# Altium PCB PNEV5180B_V2.0.PcbDoc (part 2 of 2)
Units mm, origin at the board's own origin, x right, y up, seen from the top; angles counter-clockwise.
Board outline 154.43 x 67.26 mm, 4 copper layers (Top Layer, Top, Internal Plane 1, MidLayer1, Bottom Layer, Bottom), stack 1.42 mm thick; 217 components, 117 nets, 604 pads, 342 vias.
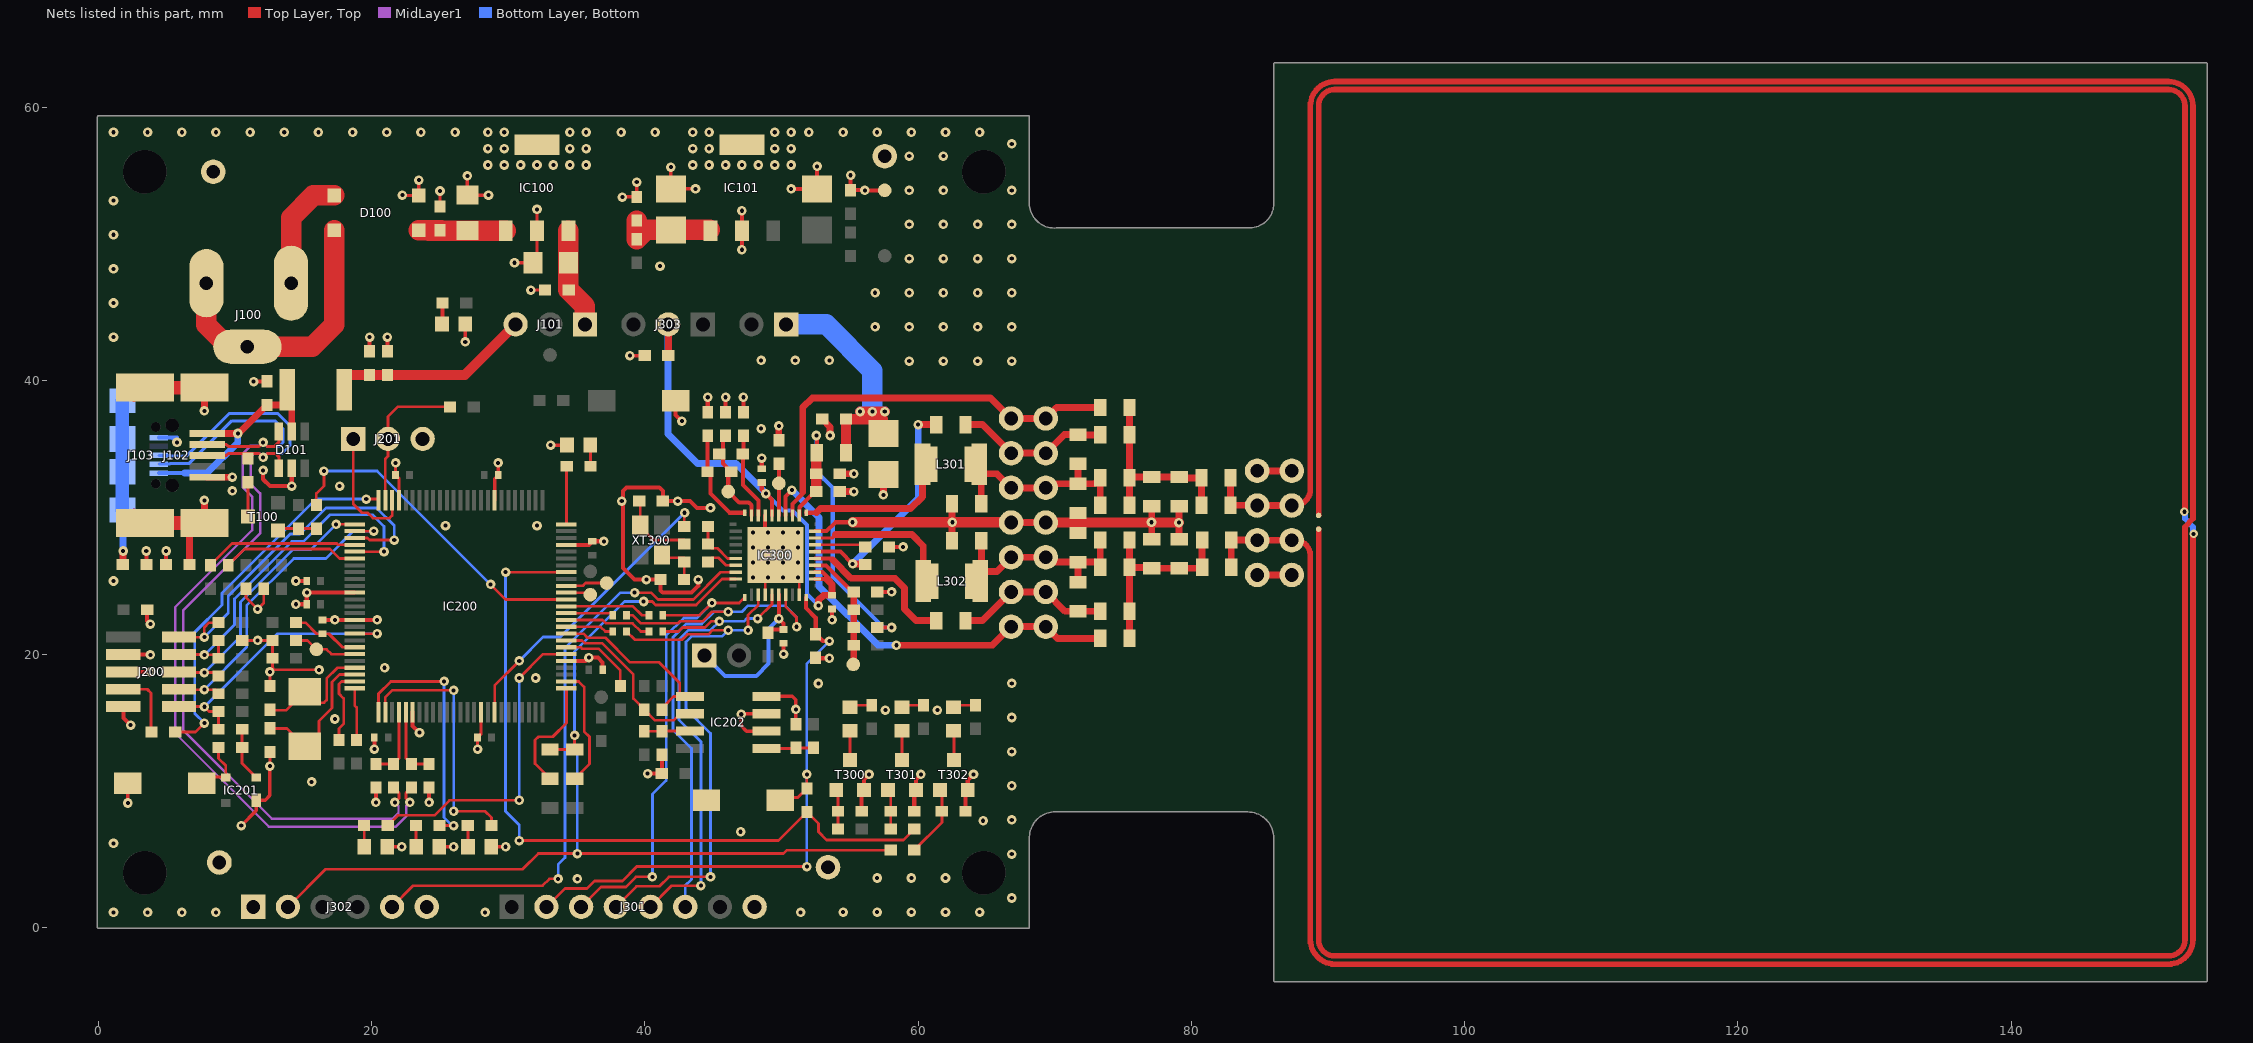
[diagram p4: the nets of this part, all layers, seen from the top]

## Via types
v1: diameter 0.7, hole 0.3, Top Layer, Top to Bottom Layer, Bottom, 324 vias
v2: diameter 0.5, hole 0.3, Top Layer, Top to Bottom Layer, Bottom, 16 vias
v3: diameter 0.6, hole 0.3, Top Layer, Top to Bottom Layer, Bottom, 2 vias

## Nets (pads, with @x,y where several pads share a name; then routed paths per layer and width w, separated by ;. In a path a pad name is that pad's centre, name@x,y a point inside that pad or via, vN(x,y) a via of type N, cw(c..) or ccw(c..) an arc to the next point about the centre after c; other vN are vias at no path point) (continued)
GND: C100.2 C101.2 C102.2 C103.2 C104.2 C105.2 C106.2 C107.2 C108.2 C109.2 C110.2 C200.2 C201.2 C202.2 C203.1 C204.1 C205.1 C206.1 C207.1 C208.1 C209.1 C210.1 C211.1 C212.1 C213.1 C214.1 C300.2 C301.1 C302.2 C303.1 C304.1 C309.2 C310.1 C311.1 C312.1 C313.1 C314.2 C315.2 C316.2 C317.2 C319.2 C323.1 C324.1 C325.1 C326.2 C327.2 C328.2 C329.1 C330.1 C331.2 C332.1 D100.4 D101.2 IC100.2 IC100.4 IC101.2 IC101.4 IC200.11 IC200.15 IC200.31 IC200.41 IC200.55 IC200.72 IC200.83 IC200.97 IC201.1 IC202.2 IC202.3 IC202.4 IC300.4 IC300.9 IC300.19 IC300.27 IC300.EP J102.5 J103.5 J200.3 J200.5 J200.9 J201.3 J301.8 J302.1 J302.6 K102.1 K103.1 K104.1 K105.1 K106.1 K310.1 K311.1 L101.1 L102.1 LD100.1 LD200.1 LD201.1 LD202.1 LD203.1 R209.1 R210.1 R212.1 R220.1 R229.2 R231.2 R237.1 R302.2 R305.2 R308.2 SW200.2 SW201.1 SW300.1 T300.2 T301.2 T302.2 | length 205.2
  Top Layer, Top w0.2: R237.1@10.514,21 v1(11.65,21) R220.1@12.736,21 R212.1@12.736,19.7 12.736,19.014 12.9,18.85 v1(16.15,18.85) ; R210.1@10.8,24.786 10.8,24.15 v1(11.65,23.3) 12.1,23.75 R209.1@12.1,24.786 ; v1(12.55,11.8) C202.2@12.55,12.836 ; C201.2@12.55,17.664 v1(12.55,18.7) ; IC300.4@48.8,24.35 48.8,26.5 v2(49,26.7) IC300.EP@49.55,27.25 ; v2(51.2,25.6) 51.3,25.5 IC300.9@51.3,24.35
  Top Layer, Top w0.25: v1(2.15,9.1) SW201.1@2.15,10.55 ; v1(10.45,7.45) 11.552,8.552 IC201.1@11.552,9.3 12.2,9.3 12.55,9.65 v1(12.55,11.8) ; LD200.1@21.15,5.9 v1(22.2,5.9) ; v1(21.75,34) 21.742,33.992 C211.1@21.742,33.1 22,32.842 IC200.97@22,31.25 ; v1(22.25,53.6) 22.28,53.57 D100.4@23.449,53.57 v1(23.45,54.7) v1(23.45,54.7) ; LD202.1@24.95,5.9 v1(26,5.9) ; C100.2@25,52.764 v1(25,53.9) ; v1(26.85,42.85) LD100.1@26.85,44.15 ; v1(27,55) C101.2@27,53.6 v1(28.55,53.6) ; v1(27.75,13.05) 27.742,13.058 C206.1@27.742,13.9 28,14.158 IC200.41@28,15.75 ; LD203.1@28.75,5.9 v1(29.8,5.9) ; IC200.83@29,31.25 29,32.842 C207.1@29.258,33.1 29.258,33.992 v1(29.25,34) ; v1(30.45,48.65) C102.2@31.8,48.65 32.1,48.95 IC100.2@32.1,51 v1(32.1,52.55) ; v1(31.65,46.65) C103.2@32.686,46.65 ; v1(33.1,35.3) LD201.1@34.3,35.3 ; v1(38.35,53.45) 38.364,53.464 C104.2@39.4,53.464 v1(39.4,54.55) ; v1(38.9,41.85) C331.2@39.986,41.85 ; v1(41.9,55.65) C105.2@41.9,54.05 v1(43.7,54.05) ; IC202.2@48.894,14.365 47.435,14.365 47.05,14.75 v1(47.05,15.6) 47.085,15.635 IC202.3@48.894,15.635 ; IC202.4@48.894,16.905 50.795,16.905 51.05,16.65 v1(51.05,15.95) R229.2@51.05,14.864
  Top Layer, Top w0.3: J200.9@1.818,16.16 1.818,15.332 v1(2.35,14.8) ; J200.5@1.818,18.7 v1(3.8,18.7) ; J200.3@1.818,19.97 3.78,19.97 v1(3.8,19.95) ; v1(3.5,27.55) 3.514,27.536 L102.1@3.514,26.55 ; C200.2@3.564,23.25 3.564,22.436 v1(3.8,22.2) ; L101.1@4.936,26.55 4.936,27.536 v1(4.95,27.55) ; v1(11.35,39.95) 11.364,39.964 C108.2@12.35,39.964 ; v1(12.05,33.45) 12.05,32.8 12.55,32.3 v1(14.15,32.3) D101.2@14.15,33.6 ; v1(14.45,23.65) C213.1@15.242,23.65 15.242,24.492 v1(15.25,24.5) ; v1(14.45,25.35) C212.1@15.242,25.35 ; v1@15.4,24.5 IC200.11@18.75,24.5 ; C205.1@16.4,22.508 16.408,22.5 v1(17.3,22.5) IC200.15@18.75,22.5 v1(20.4,22.5) ; C109.2@19.85,42.164 v1(19.85,43.2) ; C208.1@20.192,13.9 20.192,13.058 v1(20.2,13.05) ; v1(20.3,9.15) C203.1@20.3,10.236 ; C110.2@21.15,42.164 v1(21.15,43.2) ; IC200.31@23,15.75 23,14.75 v1(23.5,14.25) ; v1(24.2,9.15) C204.1@24.2,10.236 ; IC200.55@34.25,19.5 35.65,19.5 v1(35.9,19.75) 36.55,19.75 36.908,19.392 C209.1@36.908,18.85 ; IC200.72@34.25,28 35.892,28 C210.1@36.15,28.258 36.992,28.258 v1(37,28.25) ; v1(40.2,11.25) C214.1@41.236,11.25 41.236,12.623 R231.2@41.25,12.636 ; SW200.2@42.25,38.55 42.25,37.5 v1(42.7,37.05) ; v1(43.9,25.45) 43.9,24.986 43.414,24.5 41.3,24.5 41.136,24.664 C324.1@41.136,25.45 v1(40.1,25.45) 39.25,25.45 38.4,26.3 38.4,31.95 38.65,32.2 41.05,32.2 41.314,31.936 C323.1@41.314,31.2 v1(42.4,31.2) 43.3,31.2 43.8,30.7 v1(44.8,30.7) ; C328.2@44.6,37.714 v1(44.6,38.8) ; C327.2@45.9,37.714 v1(45.9,38.8) ; v1(47.1,49.6) IC101.2@47.1,51 v1(47.1,52.45) ; C326.2@47.2,37.714 v1(47.2,38.8) ; C329.1@48.55,33.566 v1(48.55,34.35) ; IC300.27@48.8,30.15 48.8,28 IC300.EP@49.55,27.25 v2(51.2,25.6) ; v1(50.15,20) C325.1@50.15,20.792 ; v1(50.7,54.05) C106.2@52.6,54.05 v1(52.6,55.7) ; IC300.19@52.45,29 53.3,29 53.95,29.65 v1(55.2,29.65) ; C309.2@52.5,19.736 52.536,19.7 v1(53.5,19.7) ; v1(53.7,22.5) C330.1@53.7,23.292 ; v1(55.05,55.05) C107.2@55.05,53.964 56.086,53.964 v1(56.1,53.95) K102.1@57.55,53.95 ; R302.2@55.864,8.55 T300.2@55.864,9.782 ; T300.2@56.032,10.05 56.032,10.832 v1(56.4,11.2) ; C332.1@57.014,24.55 v1(58.05,24.55) ; C304.1@57.864,27.85 v1(58.9,27.85) ; R305.2@59.714,8.55 T301.2@59.714,9.832 ; T301.2@59.832,10.05 59.832,10.832 v1(60.2,11.2) ; R308.2@63.464,8.55 T302.2@63.464,9.782 ; T302.2@63.632,10.05 63.632,10.782 v1(64.05,11.2)
  Top Layer, Top w0.5: J102.5@7.95,32.95 v1(9.8,32.95) ; C319.2@49.8,35.664 v1(49.8,36.7) ; C301.1@52.986,37.2 53.55,36.636 v1(53.55,36) ; C303.1@54.264,31.9 v1(55.3,31.9) ; C302.2@54.264,33.2 v1(55.3,33.2) ; v1(57.45,31.65) C300.2@57.45,33.15 ; C314.2@62.483,28.3 62.483,29.65 v1@62.483,29.667 ; C310.1@62.483,31 v1@62.483,29.667 ; v1(62.5,29.65) v1@62.483,29.667 ; K310.1@66.802,29.63 K311.1@69.342,29.63 ; C316.2@77.1,28.417 77.1,29.63 C312.1@77.1,30.833 ; C317.2@79.1,28.417 79.1,29.611 v1(79.08,29.63) 79.1,29.65 C313.1@79.1,30.833
  Top Layer, Top w0.75: v1(55.2,29.65) 62.483,29.65 v1(62.5,29.65) K310.1@66.783,29.65 ; K311.1@69.342,29.63 77.1,29.63 v1(79.08,29.63)
  Bottom Layer, Bottom w0.3: J103.5@4.425,35.85 5.4,35.85 ; 5.4,35.85 v1(5.75,35.5) 5.75,35.85 5.4,35.85
  other v1: 1.1,1.1 3.6,1.1 6.1,1.1 8.6,1.1 28.3,1.1 51.4,1.1 54.5,1.112 57,1.112 59.5,1.112 62,1.112 64.5,1.112 66.85,2.15 35.05,3.55 57,3.612 59.5,3.612 62,3.612 66.85,5.362 1.1,6.15 47,7 64.75,7.8 66.85,7.862 66.85,10.362 15.6,10.65 66.85,12.862 17.3,15.25 66.85,15.362 57.6,15.9 61.4,15.9 52.7,17.85 66.85,17.862 32,18.25 20.95,19 1.1,25.35 25.4,29.4 32.1,29.4 77.08,29.65 38.3,31.2 9.8,31.95 17.65,32.3 48.5,36.5 59.35,41.45 61.85,41.45 64.35,41.45 66.85,41.45 48.5,41.5 51,41.5 53.5,41.5 1.1,43.2 56.85,43.95 59.35,43.95 61.85,43.95 64.35,43.95 66.85,43.95 1.1,45.7 56.85,46.45 59.35,46.45 61.85,46.45 64.35,46.45 66.85,46.45 1.1,48.2 41.1,48.4 59.35,48.95 61.85,48.95 64.35,48.95 66.85,48.95 1.1,50.7 59.35,51.45 61.85,51.45 64.35,51.45 66.85,51.45 1.1,53.2 59.35,53.95 61.85,53.95 66.85,53.95 28.5,55.8 29.7,55.8 30.9,55.8 32.1,55.8 33.3,55.8 34.5,55.8 35.7,55.8 43.5,55.8 44.7,55.8 45.9,55.8 47.1,55.8 48.3,55.8 49.5,55.8 50.7,55.8 59.35,56.45 61.85,56.45 28.5,57 29.7,57 34.5,57 35.7,57 43.5,57 44.7,57 49.5,57 50.7,57 66.85,57.35 1.1,58.2 3.6,58.2 6.1,58.2 8.6,58.2 11.1,58.2 13.6,58.2 16.1,58.2 18.6,58.2 21.1,58.2 23.6,58.2 26.1,58.2 28.5,58.2 29.7,58.2 34.5,58.2 35.7,58.2 38.25,58.2 40.75,58.2 43.5,58.2 44.7,58.2 49.5,58.2 50.7,58.2 52,58.2 54.5,58.2 57,58.2 59.5,58.2 62,58.2 64.5,58.2
  other v2: 47.9,25.6 49,25.6 50.1,25.6 47.9,26.7 50.1,26.7 51.2,26.7 47.9,27.8 49,27.8 50.1,27.8 51.2,27.8 47.9,28.9 49,28.9 50.1,28.9 51.2,28.9
GPI1: IC200.65 K204.1 | length 1.8
  Top Layer, Top w0.2: IC200.65@34.25,24.5 35.8,24.5 K204.1@36,24.3
GPO1: IC300.38 J302.5 | length 45.3
  Top Layer, Top w0.2: J302.5@21.488,1.5 23.038,3.05 32.5,3.05 33,3.55 v1(33.65,3.55) ; v1(39.25,24.5) 40.45,24.5 40.95,24 43.55,24 45.55,26 IC300.38@46.65,26
  Bottom Layer, Bottom w0.2: v1(33.65,3.55) 33.65,4.6 34.15,5.1 34.15,20.45 38.2,24.5 v1(39.25,24.5)
IRQ: IC300.39 J302.2 R232.1 R235.1 R307.2 | length 77.8
  Top Layer, Top w0.2: J302.2@13.868,1.5 16.618,4.25 31.05,4.25 32.2,5.4 v1(35.05,5.4) 50.15,5.4 50.4,5.65 R307.2@57.986,5.65 ; R235.1@33.05,13.017 R232.1@34.85,13.017 v1(34.85,14.05) ; v1(39.9,23.85) 40.534,23.85 40.784,23.6 43.75,23.6 45.65,25.5 IC300.39@46.65,25.5
  Bottom Layer, Bottom w0.2: v1(35.05,5.4) 35.05,11.9 35.05,12.75 34.85,12.95 v1(34.85,14.05) 34.85,20.2 38.5,23.85 v1(39.9,23.85)
LED_B: IC200.26 R223.1 | length 18.5
  Top Layer, Top w0.2: IC200.26@20.5,15.75 20.5,17.1 21.4,18 v1(25.3,18) ; R223.1@24.964,7.45 v1(26,7.45)
  Bottom Layer, Bottom w0.2: v1(25.3,18) 25.3,8.05 v1@26,7.35
LED_G: IC200.27 R226.1 | length 18.7
  Top Layer, Top w0.2: IC200.27@21,15.75 21,16.85 21.5,17.35 v1(26,17.35) ; v1(26,8.5) 28.3,8.5 28.764,8.036 R226.1@28.764,7.45
  Bottom Layer, Bottom w0.2: v1(26,8.5) v1(26,17.35)
LED_O: IC200.75 R222.1 | length 4.3
  Top Layer, Top w0.2: IC200.75@34.25,29.5 34.25,33.714 R222.1@34.286,33.75
LED_R: IC200.56 R221.1 | length 23.5
  Top Layer, Top w0.2: R221.1@21.164,7.45 21.914,8.2 24.6,8.2 25.7,9.3 v1(30.8,9.3) ; v1(30.8,18.25) 32.55,20 IC200.56@34.25,20
  Bottom Layer, Bottom w0.2: v1(30.8,9.3) v1(30.8,18.25)
LPC_BUSY: IC200.52 R232.2 R233.2 | length 8.8
  Top Layer, Top w0.2: IC200.52@34.25,18 35.15,18 35.55,17.6 35.55,14.35 35.95,13.95 35.95,11.967 R233.2@34.85,10.867
LPC_IRQ: IC200.51 R234.2 R235.2 | length 8.6
  Top Layer, Top w0.2: R235.2@33.05,10.883 31.95,11.983 31.95,13.7 32.2,13.95 33.25,13.95 34.25,14.95 IC200.51@34.25,17.5
LPC_OSC: IC200.43 R318.1 | length 22.1
  Top Layer, Top w0.2: IC200.43@29,15.75 29,17.7 v1(30.8,19.5) ; R318.1@42.886,29.35 v1@42.886,30.336
  Top Layer, Top w0.3: v1@42.886,30.336 v1(42.9,30.35)
  Bottom Layer, Bottom w0.2: v1(30.8,19.5) 32.55,21.25 33.8,21.25 v1(42.9,30.35)
MISO: IC300.5 J301.5 R241.1 | length 36
  Top Layer, Top w0.2: J301.5@40.411,1.5 41.961,3.05 v1(44.1,3.05) ; R241.1@41.308,21.65 42.45,21.65 42.75,21.95 44.4,21.95 44.85,22.4 v1(45.45,22.4) ; v1(48.25,22.6) 49.3,23.65 IC300.5@49.3,24.35
  Bottom Layer, Bottom w0.2: v1(44.1,3.05) 44.1,13.584 42.5,15.184 42.5,21.05 43.2,21.75 44.8,21.75 v1(45.45,22.4) 47.25,22.4 47.45,22.6 v1(48.25,22.6)
MOSI: IC300.3 J301.4 R242.1 | length 41.6
  Top Layer, Top w0.2: J301.4@37.871,1.5 39.371,3 41.05,3 41.75,3.7 v1(44.8,3.7) ; R242.1@38.658,21.65 39.258,21.05 42.7,21.05 43.1,21.45 44.65,21.45 44.95,21.75 v1(46.1,21.75) ; v1(47.55,21.75) 47.55,22.85 48.3,23.6 IC300.3@48.3,24.35
  Bottom Layer, Bottom w0.2: v1(44.8,3.7) 44.8,14.2 43,16 43,20.9 43.4,21.3 45.65,21.3 v1(46.1,21.75) v1(47.55,21.75)
NetC100_1: C100.1 C101.1 D100.3 IC100.1 | length 7.3
  Top Layer, Top w1.5: D100.3@23.449,51.03 C100.1@25.094,51.03 ; 24.186,51 C101.1@27,51 IC100.1@29.8,51
NetC102_1: C102.1 C103.1 IC100.3 J101.1 | length 7.4
  Top Layer, Top w1.5: IC100.3@34.4,51 C102.1@34.4,48.65 34.4,46.664 C103.1@34.414,46.65 35.611,45.453 J101.1@35.611,44.134
NetC104_1: C104.1 C105.1 IC101.1 R100.1 | length 7
  Top Layer, Top w1.5: C104.1@39.4,51.736 R100.1@39.4,50.364 40.086,51.05 C105.1@41.9,51.05 IC101.1@44.75,51.05
NetC109_1: C109.1 C110.1 J101.3 L100.2 | length 14.1
  Top Layer, Top w0.5: J101.3@30.529,44.136 J101.3@30.531,44.134
  Top Layer, Top w0.75: L100.2@17.983,39.35 L100.2@17.996,39.336 ; L100.2@17.996,40.436 C109.1@19.85,40.436 C110.1@21.15,40.436 26.829,40.436 J101.3@30.529,44.136
NetC201_1: C201.1 IC200.22 XT200.2 | length 9.1
  Top Layer, Top w0.2: C201.1@12.55,15.9 13.75,15.9 XT200.2@15.1,17.25 15.9,16.45 16.5,16.45 16.7,16.65 16.7,18.2 17.5,19 IC200.22@18.75,19
NetC202_1: C202.1 IC200.23 XT200.1 | length 9.5
  Top Layer, Top w0.2: C202.1@12.55,14.564 13.786,14.564 XT200.1@15.1,13.25 XT200.1@15.3,13.25 ; XT200.1@16.15,14.05 16.15,15.1 17.1,16.05 17.1,17.95 17.65,18.5 IC200.23@18.75,18.5
NetC203_2: C203.2 IC200.29 R215.2 | length 5.2
  Top Layer, Top w0.22: C203.2@20.3,11.964 R215.2@21.6,11.964 21.99,12.354 IC200.29@21.99,15.75
NetC204_2: C204.2 IC200.30 R217.2 | length 5.2
  Top Layer, Top w0.22: IC200.30@22.51,15.75 22.51,12.354 R217.2@22.9,11.964 C204.2@24.2,11.964
NetC205_2: C205.2 IC200.19 R218.1 | length 5
  Top Layer, Top w0.2: R218.1@14.464,22.3 15.15,22.3 15.958,21.492 C205.2@16.4,21.492 16.858,21.492 17.85,20.5 IC200.19@18.75,20.5
NetC300_1: C300.1 C301.2 J300.1 L300.2 | length 19.5
  Top Layer, Top w0.75: L300.2@54.717,34.75 54.717,37.197 C301.2@54.714,37.2 57.4,37.2 ; v1(55.75,37.75) v1(56.65,37.75) v1(57.55,37.75)
  Bottom Layer, Bottom w0.75: v1(55.75,37.75) v1(56.65,37.75) v1(57.55,37.75)
  Bottom Layer, Bottom w1.5: J300.1@50.334,44.134 53.266,44.134 56.65,40.75 v1(56.65,37.75)
NetC302_1: C302.1 C303.2 IC300.22 L300.1 R322.1 | length 24.1
  Top Layer, Top w0.3: IC300.22@51.3,30.15 51.3,30.75 C303.2@52.275,31.725 ; v1(52.55,36) 52.583,35.967 L300.1@52.583,34.75 ; R322.1@57.014,21.95 v1(58.05,21.95)
  Top Layer, Top w0.75: C303.2@52.536,31.9 C302.1@52.536,33.2 L300.1@52.536,34.75 ; L300.1@52.583,34.483 L300.1@52.583,34.75
  Bottom Layer, Bottom w0.3: v1(52.55,36) 52.55,33.35 53.75,32.15 53.75,25.65 57.45,21.95 v1(58.05,21.95)
NetC304_2: C304.2 IC300.17 | length 3.7
  Top Layer, Top w0.2: IC300.17@52.45,28 55.986,28 C304.2@56.136,27.85
NetC305_1: C305.1 IC300.23 K300.1 K301.1 | length 31.2
  Top Layer, Top w0.3: IC300.23@50.8,30.15 50.8,31 51.55,31.75 51.55,31.85
  Top Layer, Top w0.5: 51.55,31.85 51.55,38.05 52.25,38.75 65.302,38.75 K300.1@66.802,37.25 K301.1@69.342,37.25 70.142,38.05 C305.1@73.333,38.05
NetC305_2: C305.2 C307.2 C308.2 C312.2 C313.2 R309.1 R311.2 R313.2 | length 14.5
  Top Layer, Top w0.5: C308.2@75.467,30.9 C307.2@75.467,32.9 ; C305.2@75.467,38.05 R309.1@75.467,36.05 C307.2@75.467,32.9 ; R313.2@80.733,30.9 R311.2@80.733,32.9 79.167,32.9 C313.2@79.1,32.967 C312.2@77.1,32.967 75.534,32.967 C307.2@75.467,32.9
NetC306_1: C306.1 IC300.16 R321.1 | length 17.6
  Top Layer, Top w0.3: IC300.16@52.45,27.5 54.3,27.5 v1(55.2,26.6)
  Top Layer, Top w0.5: v1(55.2,26.6) 56.086,26.6 R321.1@56.136,26.55 ; v1(60,36.8) C306.1@61.333,36.8
  Bottom Layer, Bottom w0.5: v1(55.2,26.6) 60,31.4 v1(60,36.8)
NetC306_2: C306.2 K302.1 K303.1 R309.2 R310.1 | length 11.3
  Top Layer, Top w0.5: C306.2@63.467,36.8 64.712,36.8 K302.1@66.802,34.71 K303.1@69.342,34.71 70.698,36.067 R310.1@71.7,36.067 71.717,36.05 R309.2@73.333,36.05
NetC307_1: C307.1 C308.1 C310.2 C311.2 K304.1 K305.1 L301.2 R310.2 | length 16.1
  Top Layer, Top w0.5: L301.2@63.924,33.9 L301.2@64.617,33.207 ; C310.2@64.617,31 L301.2@64.617,33.207 ; K305.1@69.342,32.17 K304.1@66.802,32.17 65.773,33.2 64.624,33.2 L301.2@64.617,33.207 ; K305.1@69.342,32.17 69.638,32.467 C311.2@71.7,32.467 ; R310.2@71.7,33.933 C311.2@71.7,32.467 ; C308.1@73.333,30.9 C307.1@73.333,32.9 72.9,32.467 C311.2@71.7,32.467
NetC314_1: C314.1 C315.1 C318.1 C320.1 K316.1 K317.1 L302.2 R316.1 | length 16.6
  Top Layer, Top w0.5: L302.2@63.974,25.35 64.5,25.35 L302.2@64.633,25.483 ; C314.1@64.617,28.3 64.633,28.284 L302.2@64.633,26.05 ; L302.2@64.633,25.35 L302.2@64.633,25.483 ; R316.1@71.7,25.267 C315.1@71.7,26.733 ; C318.1@73.333,28.35 C320.1@73.333,26.35 72.95,26.733 C315.1@71.7,26.733 ; L302.2@64.633,25.483 L302.2@64.633,26.05 ; L302.2@64.633,26.05 65.762,26.05 K316.1@66.802,27.09 K317.1@69.342,27.09 69.7,26.733 C315.1@71.7,26.733
NetC316_1: C316.1 C317.1 C318.2 C320.2 C322.2 R314.2 R315.2 R317.1 | length 14.6
  Top Layer, Top w0.5: C322.2@75.467,21.15 R317.1@75.467,23.15 C320.2@75.467,26.35 ; C318.2@75.467,28.35 C320.2@75.467,26.35 ; R314.2@80.783,28.35 R315.2@80.783,26.35 80.716,26.283 C317.1@79.1,26.283 C316.1@77.1,26.283 77.033,26.35 C320.2@75.467,26.35
NetC319_1: C319.1 IC300.25 K323.1 | length 3.8
  Top Layer, Top w0.3: IC300.25@49.8,30.15 K323.1@49.8,32.5 C319.1@49.8,33.936
NetC321_1: C321.1 IC300.15 | length 11.6
  Top Layer, Top w0.3: IC300.15@52.45,27 53.75,27
  Top Layer, Top w0.5: 53.75,26.9 55.1,25.55 58.3,25.55 59,24.85 59,23.3 59.85,22.45 C321.1@61.333,22.45
NetC321_2: C321.2 K318.1 K319.1 R316.2 R317.2 | length 11.3
  Top Layer, Top w0.5: C321.2@63.467,22.45 64.702,22.45 K318.1@66.802,24.55 K319.1@69.342,24.55 70.76,23.133 R316.2@71.7,23.133 73.316,23.133 R317.2@73.333,23.15
NetC322_1: C322.1 IC300.24 K320.1 K321.1 | length 33.2
  Top Layer, Top w0.3: IC300.24@50.3,30.15 50.3,31.55 v1(50.75,32)
  Top Layer, Top w0.5: v1(58.4,20.65) 65.442,20.65 K320.1@66.803,22.01 K321.1@69.343,22.01 70.203,21.15 C322.1@73.333,21.15
  Bottom Layer, Bottom w0.5: v1(50.75,32) 52.75,30 52.75,24.95 57.05,20.65 v1(58.4,20.65)
NetC323_2: C323.2 R319.1 XT300.3 | length 5.5
  Top Layer, Top w0.2: C323.2@39.586,31.2 39.65,31.136 XT300.3@39.65,29.45 39.65,29.326 40.626,28.35 R319.1@42.886,28.35
NetC324_2: C324.2 R320.1 XT300.1 | length 2.8
  Top Layer, Top w0.2: XT300.1@41.236,27.236 XT300.1@41.25,27.25 ; XT300.1@41.45,27.05 R320.1@42.886,27.05 ; C324.2@42.864,25.45 42.886,25.473 R320.1@42.886,26.75
NetC326_1: C326.1 IC300.28 R326.1 | length 6.3
  Top Layer, Top w0.3: C326.1@47.2,35.986 47.2,34.686 R326.1@47.164,34.65 47.164,32.386 48.3,31.25 IC300.28@48.3,30.15
NetC327_1: C327.1 IC300.29 K322.1 R326.2 R327.2 | length 7.5
  Top Layer, Top w0.3: C327.1@45.9,35.986 45.7,35.786 45.7,34.914 R326.2@45.436,34.65 45.7,34.386 45.7,33.964 R327.2@46.314,33.35 ; R327.2@46.1,33.336 K322.1@46.1,31.9 46.9,31.1 47.6,31.1 47.8,30.9 IC300.29@47.8,30.15
NetC328_1: C328.1 IC300.30 R327.1 | length 7.3
  Top Layer, Top w0.3: R327.1@44.586,33.35 44.586,35.973 C328.1@44.6,35.986 ; R327.1@44.8,33.336 44.8,31.75 46.2,30.35 IC300.30@47.3,30.35
NetC329_2: C329.2 C330.2 C331.1 IC300.12 IC300.13 IC300.26 J303.2 | length 37.3
  Top Layer, Top w0.3: C329.2@48.55,32.55 48.55,32.05 v1(48.85,31.75) 49.3,31.3 IC300.26@49.3,30.15 ; IC300.12@52.45,25.5 53.3,25.5 ; IC300.13@52.45,26 53,26 53.6,25.4
  Top Layer, Top w0.5: J303.2@41.698,44.134 41.714,44.119 C331.1@41.714,41.85 ; v1(52.7,23.55) 52.7,23.95 53.058,24.308 C330.2@53.7,24.308 53.7,25.1 53.3,25.5
  Bottom Layer, Bottom w0.3: v1(48.85,31.75) 50.1,30.5 50.8,30.5 51.85,29.45 51.85,24.4 v1(52.7,23.55)
  Bottom Layer, Bottom w0.5: J303.2@41.698,44.134 41.698,36.102 43.85,33.95 46.65,33.95 v1(48.85,31.75)
NetC332_2: C332.2 IC300.14 K324.1 R322.2 R323.2 R324.2 | length 8.6
  Top Layer, Top w0.3: IC300.14@52.45,26.5 53.25,26.5 C332.2@55.018,24.732
  Top Layer, Top w0.5: K324.1@55.25,19.25 55.286,19.286 R323.2@55.286,20.65 ; C332.2@55.286,24.55 R324.2@55.286,23.25 R322.2@55.286,21.95 R323.2@55.286,20.65 ; R323.2@55.3,20.636 R323.2@55.286,20.65
NetD100_1: D100.1 J100.1 | length 8.6
  Top Layer, Top w1.5: J100.1@14.1,47.15 14.1,51.95 15.72,53.57 D100.1@17.251,53.57
NetD100_2: D100.2 J100.2 J100.3 | length 20.7
  Top Layer, Top w1.5: J100.2@7.9,47.15 7.9,44.1 9.5,42.5 J100.3@10.9,42.5 15.65,42.5 17.251,44.101 D100.2@17.251,51.03
NetIC200_4: IC200.4 R204.1 | length 11.2
  Top Layer, Top w0.2: R204.1@8.2,26.514 9.786,28.1 17.45,28.1 17.55,28 IC200.4@18.75,28
NetIC200_6: IC200.6 R211.2 | length 10
  Top Layer, Top w0.2: R211.2@9.5,26.514 10.686,27.7 16.95,27.7 17.65,27 IC200.6@18.75,27
NetIC200_20: IC200.20 K200.1 R220.2 | length 4.9
  Top Layer, Top w0.2: R220.2@14.464,21 15.3,21 K200.1@15.95,20.35 ; K200.1@15.75,20.35 K200.1@15.95,20.35 ; IC200.20@18.75,20 17.05,20 16.7,20.35 K200.1@15.95,20.35
NetIC200_24: IC200.24 R214.2 | length 5.6
  Top Layer, Top w0.2: R214.2@17.6,13.714 17.6,14.55 17.95,14.9 17.95,16.75 17.6,17.1 17.6,17.8 17.8,18 IC200.24@18.75,18
NetIC200_25: IC200.25 R213.2 | length 3.8
  Top Layer, Top w0.2: IC200.25@18.75,17.5 18.75,16.25 18.9,16.1 R213.2@18.9,13.714
NetIC200_57: IC200.57 R207.2 | length 5.8
  Top Layer, Top w0.2: IC200.57@34.25,20.5 35.3,20.5 35.4,20.4 36.6,20.4 38.2,18.8 R207.2@38.2,17.664
NetIC200_60: IC200.60 R242.2 | length 3.5
  Top Layer, Top w0.2: IC200.60@34.25,22 36.75,22 37.1,21.65 R242.2@37.642,21.65
NetIC200_61: IC200.61 R241.2 | length 6.4
  Top Layer, Top w0.2: IC200.61@34.25,22.5 36.9,22.5 37.15,22.25 39.1,22.25 39.7,21.65 R241.2@40.292,21.65
NetIC200_62: IC200.62 R239.2 | length 3.5
  Top Layer, Top w0.2: IC200.62@34.25,23 37.492,23 R239.2@37.642,22.85
NetIC200_63: IC200.63 R240.2 | length 6.3
  Top Layer, Top w0.2: IC200.63@34.25,23.5 39.116,23.5 39.766,22.85 R240.2@40.292,22.85
NetIC200_100: IC200.100 R238.1 | length 27.4
  Top Layer, Top w0.2: R238.1@5.614,14.3 7.1,14.3 v1(7.75,14.95) ; v1(19.6,31.35) 20.4,31.35 IC200.100@20.5,31.25
  Bottom Layer, Bottom w0.2: v1(7.75,14.95) 7.05,15.65 7.05,21.6 9.05,23.6 9.05,24.478 15.922,31.35 v1(19.6,31.35)
NetIC201_2: IC201.2 R206.1 R216.2 | length 4
  Top Layer, Top w0.2: R206.1@10.514,14.5 R216.2@10.514,13.15 10.514,12.014 IC201.2@11.552,10.976
NetIC201_3: IC201.3 R216.1 SW201.2 | length 4.2
  Top Layer, Top w0.2: SW201.2@7.55,11 9.293,11 IC201.3@9.316,10.976 9.316,11.834 8.786,12.364 R216.1@8.786,13.15
NetIC202_1: IC202.1 R225.2 R229.1 | length 3.5
  Top Layer, Top w0.2: IC202.1@48.894,13.095 51.009,13.095 R229.1@51.05,13.136 R225.2@52.35,13.136
NetIC202_7: IC202.7 R230.2 R231.1 | length 3.4
  Top Layer, Top w0.2: R230.2@39.95,14.364 R231.1@41.25,14.364 ; R231.1@41.179,14.365 IC202.7@43.306,14.365
NetIC300_18: IC300.18 L302.1 | length 10.9
  Top Layer, Top w0.25: IC300.18@52.45,28.5 53.7,28.5 53.95,28.75
  Top Layer, Top w0.5: 53.95,28.75 59.55,28.75 60.367,27.933 L302.1@60.367,25.35
NetIC300_21: IC300.21 L301.1 | length 11.4
  Top Layer, Top w0.3: IC300.21@51.8,30.35 52.55,30.35
  Top Layer, Top w0.5: 52.55,30.35 52.85,30.65 59.45,30.65 60.317,31.517 L301.1@60.317,33.9
NetIC300_36: IC300.36 R318.2 R319.2 | length 3.8
  Top Layer, Top w0.2: R318.2@44.614,29.35 R319.2@44.614,28.05 44.914,27.75 45.3,27.75 46.05,27 IC300.36@46.65,27
NetIC300_37: IC300.37 R320.2 | length 2.4
  Top Layer, Top w0.2: R320.2@44.614,26.75 44.914,27.05 45.4,27.05 45.95,26.5 IC300.37@46.65,26.5
NetJ102_6: J102.6 J102.7 J102.8 J102.9 L101.2 | length 17.6
  Top Layer, Top w0.5: J102.9@2.6,30.4 J102.9@3.4,29.6 ; J102.6@2.6,38.7 J102.6@3.4,39.5 ; L101.2@6.664,26.55 6.664,29.014 7.25,29.6 J102.8@7.75,29.6 v1(7.75,31.25) ; v1(7.75,37.8) J102.7@7.75,39.5
  Top Layer, Top w1: J102.9@3.4,29.6 J102.8@7.25,29.6 ; J102.6@3.4,39.5 J102.7@7.75,39.5
NetJ103_6: J103.6 J103.7 J103.8 J103.9 L102.2 | length 12
  Top Layer, Top w0.5: L102.2@1.786,26.55 1.786,27.536 v1(1.8,27.55)
  Bottom Layer, Bottom w0.5: J103.9@1.75,30.55 J103.9@1.8,30.5 ; 1.8,27.9 J103.9@1.8,30.5 ; J103.9@1.8,30.85 J103.9@1.8,30.5
  Bottom Layer, Bottom w1: J103.9@1.75,30.55 J103.8@1.75,33.35 J103.7@1.75,35.75 J103.6@1.75,38.55
NetK306_1: K306.1 K307.1 | length 2.5
  Top Layer, Top w0.5: K306.1@84.811,33.415 K307.1@87.351,33.415
NetK308_1: K308.1 K309.1 NT1.1 R311.1 R313.1 | length 6.6
  Top Layer, Top w0.5: R311.1@82.867,32.9 R313.1@82.867,30.9 84.786,30.9 K308.1@84.811,30.875 K309.1@87.506,30.875
NetK312_1: K312.1 K313.1 NT1.2 R314.1 R315.1 | length 6.4
  Top Layer, Top w0.5: R315.1@82.917,26.35 R314.1@82.917,28.35 84.796,28.35 K312.1@84.811,28.335 K313.1@87.351,28.335
  other v3: 153.364,28.805 152.68,30.418
NetK314_1: K314.1 K315.1 | length 2.5
  Top Layer, Top w0.5: K314.1@84.811,25.795 K315.1@87.351,25.795
NetLD100_2: LD100.2 R102.1 | length 1.6
  Top Layer, Top w0.3: LD100.2@25.15,44.15 25.186,44.186 R102.1@25.186,45.7
NetLD200_2: LD200.2 R221.2 | length 1.6
  Top Layer, Top w0.2: R221.2@19.436,7.45 19.45,7.436 LD200.2@19.45,5.9
NetLD201_2: LD201.2 R222.2 | length 1.6
  Top Layer, Top w0.2: LD201.2@36,35.3 36.014,35.286 R222.2@36.014,33.75
NetLD202_2: LD202.2 R223.2 | length 1.6
  Top Layer, Top w0.2: R223.2@23.236,7.45 23.25,7.436 LD202.2@23.25,5.9
NetLD203_2: LD203.2 R226.2 | length 1.6
  Top Layer, Top w0.2: R226.2@27.036,7.45 27.05,7.436 LD203.2@27.05,5.9
NetLD300_1: LD300.1 T300.3 | length 2.2
  Top Layer, Top w0.2: T300.3@55.016,12.26 LD300.1@55.016,14.434
NetLD300_2: LD300.2 R300.1 | length 1.7
  Top Layer, Top w0.2: LD300.2@55,16.1 55.164,16.264 R300.1@56.6,16.264
NetLD301_1: LD301.1 T301.3 | length 2.2
  Top Layer, Top w0.2: T301.3@58.816,12.26 LD301.1@58.816,14.434
NetLD301_2: LD301.2 R303.1 | length 1.7
  Top Layer, Top w0.2: LD301.2@58.8,16.1 58.964,16.264 R303.1@60.4,16.264
NetLD302_1: LD302.1 T302.3 | length 2.2
  Top Layer, Top w0.2: T302.3@62.616,12.26 LD302.1@62.616,14.434
NetLD302_2: LD302.2 R306.1 | length 1.7
  Top Layer, Top w0.2: LD302.2@62.6,16.1 62.764,16.264 R306.1@64.2,16.264
NetR103_2: R103.2 T100.3 | length 2.5
  Top Layer, Top w0.2: T100.3@10.94,30.066 10.95,30.076 R103.2@10.95,32.586
NetR104_1: R104.1 R105.2 T100.1 | length 2.9
  Top Layer, Top w0.2: T100.1@13.15,29.05 13.286,29.186 R104.1@14.65,29.186 R105.2@15.95,29.186
NetR301_1: R301.1 R302.1 T300.1 | length 2.6
  Top Layer, Top w0.2: R301.1@54.136,7.2 R302.1@54.136,8.5 ; R302.1@54.136,8.55 T300.1@54.136,9.814
NetR304_1: R304.1 R305.1 T301.1 | length 2.5
  Top Layer, Top w0.2: R304.1@57.986,7.2 R305.1@57.986,8.5 ; R305.1@57.986,8.55 T301.1@57.986,9.764
NetR307_1: R307.1 R308.1 T302.1 | length 5
  Top Layer, Top w0.2: R307.1@59.714,5.65 61.736,7.673 R308.1@61.736,8.5 ; R308.1@61.736,8.55 T302.1@61.736,9.814
P\N\_\N\R\S\T\: C309.1 IC300.10 J301.2 R312.2 SW300.2 | length 45
  Top Layer, Top w0.2: J301.2@32.791,1.5 34.141,2.85 35.75,2.85 36.3,3.4 38.35,3.4 39.4,4.45 v1(51.85,4.45) ; SW300.2@49.9,9.3 50.5,9.3 50.7,9.5 51.186,9.5 R312.2@51.85,10.164 v1(51.85,11.2)
  Top Layer, Top w0.3: IC300.10@51.8,24.15 51.8,23.364 52.5,22.664 C309.1@52.5,21.464 53.014,20.95 v1(53.5,20.95)
  Bottom Layer, Bottom w0.2: v1(51.85,4.45) v1(51.85,11.2) 51.85,19.3 v1(53.5,20.95)
P\N\_\R\S\T\: IC200.68 R304.2 R312.1 | length 55.8
  Top Layer, Top w0.2: v1(29.8,26) IC200.68@34.25,26 ; v1(30.8,6.35) 49.764,6.35 R312.1@51.85,8.436 52.7,7.586 52.7,7 53.3,6.4 58.914,6.4 R304.2@59.714,7.2
  Bottom Layer, Bottom w0.2: v1(29.8,26) 29.8,8.5 30.8,7.5 v1(30.8,6.35)
PVDD: C325.2 IC300.6 J304.1 R325.1 | length 13.2
  Top Layer, Top w0.3: R325.1@49,21.564 49.244,21.808 C325.2@50.15,21.808 50.15,22.25 v1(49.8,22.6) IC300.6@49.8,24.35
  Bottom Layer, Bottom w0.3: J304.1@44.35,19.9 45.85,18.4 48.15,18.4 49.05,19.3 49.05,21.85 v1(49.8,22.6)
R\S\T\: IC200.17 J200.10 R203.1 R206.2 | length 21
  Top Layer, Top w0.2: J200.10@5.882,16.16 7.74,16.16 v1(7.75,16.15) 8.1,15.8 R203.1@8.786,15.8 ; R206.2@8.786,14.5 R203.1@8.786,15.8 ; R203.1@8.886,15.8 R203.1@8.786,15.8 ; IC200.17@18.75,21.5 v1(20.4,21.5)
  Bottom Layer, Bottom w0.2: v1(7.75,16.15) 13.1,21.5 v1(20.4,21.5)
RTCK: J200.7 R238.2 | length 5
  Top Layer, Top w0.2: J200.7@1.818,17.43 3.57,17.43 3.85,17.15 3.85,14.336 R238.2@3.886,14.3
RXD0: IC200.99 J201.2 R219.1 | length 11.1
  Top Layer, Top w0.2: IC200.99@21,31.25 21,34.3 21.19,34.49 J201.2@21.19,35.75 21.19,37.39 21.9,38.1 R219.1@25.736,38.1
SCK: IC300.7 J301.6 R239.1 | length 42.3
  Top Layer, Top w0.2: R239.1@38.658,22.85 39.1,22.85 39.7,22.25 42.4,22.25 42.55,22.4 44.2,22.4 44.9,23.1 v1(46.1,23.1) ; IC300.7@50.3,24.35 50.3,23.5 51.1,22.7 v1(51.1,22)
  Bottom Layer, Bottom w0.2: J301.6@42.951,1.5 42.951,3.051 43.4,3.5 43.4,13.1 42.05,14.45 42.05,21.234 43.016,22.2 44.15,22.2 45.05,23.1 v1(46.1,23.1) 47.1,23.1 47.55,23.55 50.25,23.55 51.1,22.7 v1(51.1,22)
SCL: IC200.58 IC202.6 R227.2 | length 12.7
  Top Layer, Top w0.2: IC200.58@34.25,21 35.4,21 35.6,20.8 36.85,20.8 39.15,18.5 39.15,16.736 R227.2@39.95,15.936 40.736,15.15 42.1,15.15 42.585,15.635 IC202.6@43.306,15.635
SDA: IC200.59 IC202.5 R228.2 | length 13.1
  Top Layer, Top w0.2: IC200.59@34.25,21.5 35.5,21.5 35.8,21.2 37.1,21.2 38.9,19.4 41.05,19.4 42.55,17.9 IC202.5@42.55,16.905 ; R228.2@41.35,16.15 42.105,16.905 IC202.5@42.55,16.905 ; IC202.5@43.306,16.905 IC202.5@42.55,16.905
SSEL: IC300.1 J301.3 R240.1 | length 35.1
  Top Layer, Top w0.2: J301.3@35.331,1.5 36.781,2.95 38.6,2.95 39.35,3.7 v1(40.55,3.7) ; R240.1@41.308,22.85 44,22.85 v1(44.9,23.75) 45.831,23.75 46.9,23.75 IC300.1@47.3,24.15
  Bottom Layer, Bottom w0.2: v1(40.55,3.7) 40.55,9.75 41.55,10.75 41.55,21.353 42.847,22.65 43.8,22.65 v1(44.9,23.75)
TCK: IC200.5 J200.4 R201.1 R237.2 | length 27.3
  Top Layer, Top w0.2: J200.4@5.882,19.97 7.73,19.97 v1(7.75,19.95) R201.1@8.536,19.95 ; R201.1@8.636,19.95 R201.1@8.536,19.95 ; R237.2@8.786,21 R201.1@8.786,19.7 R201.1@8.536,19.95 ; IC200.5@18.75,27.5 v1(20.9,27.5)
  Bottom Layer, Bottom w0.2: v1(7.75,19.95) 9.95,22.15 9.95,24.047 14.153,28.25 15,28.25 16.95,30.2 20.05,30.2 20.9,29.35 v1(20.9,27.5)
TDI: IC200.2 J200.8 R202.1 | length 23.5
  Top Layer, Top w0.2: J200.8@5.882,17.43 5.912,17.4 v1(7.75,17.4) R202.1@8.486,17.4 ; R202.1@8.586,17.4 R202.1@8.486,17.4 ; R202.1@8.786,17.1 R202.1@8.486,17.4 ; IC200.2@18.75,29 v1(20.15,29)
  Bottom Layer, Bottom w0.2: v1(7.75,17.4) 10.85,20.5 10.85,23.55 14.3,27 16.65,27 18.65,29 v1(20.15,29)
TDO: IC200.1 J200.6 R236.1 | length 20.1
  Top Layer, Top w0.2: J200.6@5.882,18.7 5.932,18.65 v1(7.75,18.65) R236.1@8.536,18.65 ; R236.1@8.636,18.65 R236.1@8.536,18.65 ; R236.1@8.786,18.4 R236.1@8.536,18.65 ; v1(17.4,29.5) IC200.1@18.75,29.5
  Bottom Layer, Bottom w0.2: v1(7.75,18.65) 10.4,21.3 10.4,23.8 14.25,27.65 15.55,27.65 v1(17.4,29.5)
TMS: IC200.3 J200.2 R200.1 | length 26.9
  Top Layer, Top w0.2: J200.2@5.882,21.24 v1@7.74,21.24 ; v1(7.75,21.25) v1@7.74,21.24 ; R200.1@8.786,22.3 8.1,22.3 7.74,21.94 v1@7.74,21.24 ; IC200.3@18.75,28.5 19.7,28.5 19.85,28.35 v1(21.65,28.35)
  Bottom Layer, Bottom w0.2: v1(7.75,21.25) 9.5,23 9.5,24.263 14.037,28.8 14.75,28.8 16.65,30.7 19.869,30.7 20.35,30.7 21.65,29.4 v1(21.65,28.35)
TXD0: IC200.98 J201.1 | length 9.2
  Top Layer, Top w0.2: J201.1@18.65,35.75 18.65,31 19.3,30.35 19.7,30.35 20.1,29.95 21.3,29.95 21.5,30.15 IC200.98@21.5,31.25
USB_CON: IC200.64 R105.1 | length 24.4
  Top Layer, Top w0.2: R105.1@15.95,30.914 15.95,31.75 16.5,32.3 v1(16.5,33.4) ; v1(28.7,25.1) 29.8,24 IC200.64@34.25,24
  Bottom Layer, Bottom w0.2: v1(16.5,33.4) 20.4,33.4 v1(28.7,25.1)
USB_N: D101.6 J102.2 J103.2 R217.1 | length 67.3
  Top Layer, Top w0.22: J102.2@7.95,35.35 9.36,35.35 9.5,35.21 11.76,35.21 v1(12.05,35.5) 12.34,35.21 12.91,35.21 13.2,35.5 D101.6@13.2,36.3 ; v1(22.8,9.15) 22.51,9.44 22.51,9.846 R217.1@22.9,10.236
  MidLayer1 w0.18: v1(12.05,35.5) 11.79,35.24 11.12,35.24 10.57,34.69 10.57,32.21 11.25,31.53 11.25,29.07 5.62,23.44 5.62,14.21 12.46,7.37 21.77,7.37 22.54,8.14 22.54,8.89 v1(22.8,9.15)
  Bottom Layer, Bottom w0.22: J103.2@4.425,33.9 5.21,33.9 5.275,33.965 6.65,33.965 9.765,37.08 12.92,37.08 13.5,36.5 13.5,35.485 13.225,35.21 12.34,35.21 v1(12.05,35.5)
USB_P: D101.1 J102.3 J103.3 R103.1 R215.1 | length 66.1
  Top Layer, Top w0.22: J102.3@7.95,34.55 9.36,34.55 9.5,34.69 11.76,34.69 v1(12.05,34.4) 12.34,34.69 12.96,34.69 13.2,34.45 D101.1@13.2,33.6 ; R215.1@21.6,10.236 21.99,9.846 21.99,9.44 v1(21.7,9.15)
  MidLayer1 w0.18: v1(12.05,34.4) 11.79,34.66 11.36,34.66 11.15,34.45 11.15,32.45 11.83,31.77 11.83,28.83 6.2,23.2 6.2,14.45 12.7,7.95 21.53,7.95 21.96,8.38 21.96,8.89 v1(21.7,9.15)
  Bottom Layer, Bottom w0.22: J103.3@4.425,34.55 5.21,34.55 5.275,34.485 6.435,34.485 9.55,37.6 13.135,37.6 14.02,36.715 14.02,35.27 13.44,34.69 12.34,34.69 v1(12.05,34.4)
USB_VBUS: C108.1 D101.5 J102.1 J103.1 L100.1 | length 17.1
  Top Layer, Top w0.5: J102.1@7.95,36.15 v1(10.2,36.15) 10.264,36.15 C108.1@12.35,38.236 L100.1@13.817,38.236 ; L100.1@13.8,38.219 L100.1@13.817,38.236 ; L100.1@13.817,39.35 L100.1@13.817,38.236 ; D101.5@14.15,36.3 L100.1@14.15,38.219
  Bottom Layer, Bottom w0.3: J103.1@4.425,33.25 6.3,33.25
  Bottom Layer, Bottom w0.5: 6.3,33.25 7.95,33.25 10.2,35.5 v1(10.2,36.15)
WDOFF: IC200.66 K203.1 | length 3
  Top Layer, Top w0.2: IC200.66@34.25,25 35.45,25 35.65,25.2 K203.1@37.2,25.2
pads on no net: D101.3 D101.4 IC200.7 IC200.13 IC200.14 IC200.16 IC200.18 IC200.32 IC200.33 IC200.34 IC200.35 IC200.36 IC200.37 IC200.38 IC200.39 IC200.40 IC200.44 IC200.45 IC200.46 IC200.47 IC200.48 IC200.49 IC200.50 IC200.69 IC200.70 IC200.73 IC200.74 IC200.76 IC200.77 IC200.78 IC200.79 IC200.80 IC200.81 IC200.82 IC200.85 IC200.86 IC200.87 IC200.88 IC200.89 IC200.90 IC200.91 IC200.92 IC200.93 IC200.94 IC200.95 IC300.11 IC300.20 IC300.31 IC300.32 IC300.33 IC300.34 IC300.35 J102.4 J102.10 J102.11 J103. J103.4 XT300.2 XT300.4

## Polygon pours and split planes (outlines as drawn)
+3.3V on MidLayer1 "Mid1+3.3V" (solid, remove dead copper, pour order 2): 1.75,57.65 1.75,1.65 64.75,1.65 64.75,17.25 47.9,17.25 47.9,42.1 58.4,42.1 58.4,57.65
GND on MidLayer1 "Mid1-GND_1" (solid, pour order 0): 14.65,38.2 14.65,31.6 3.65,31.6 3.65,36.65 7.1,36.65 8.65,38.2
GND on Bottom Layer, Bottom "Bot-GND_1" (solid, remove dead copper, pour order 4): 0.45,0.45 67.65,0.45 67.65,18.35 49.15,18.35 49.15,23.8 51.45,23.8 51.45,30.7 49.15,30.7 49.15,40.9 67.65,40.9 67.65,58.9 0.45,58.9
GND on Top Layer, Top "Top-GND_1" (solid, remove dead copper, pour order 6): 0.45,0.45 67.65,0.45 67.65,18.35 49.15,18.35 49.15,23.8 51.45,23.8 51.45,30.7 49.15,30.7 49.15,40.9 67.65,40.9 67.65,58.9 0.45,58.9
NetJ102_6 on Internal Plane 1 (split plane): 9.548,38.054 8.546,37.052 6.3,37.052 6.235,37.044 6.174,37.018 6.122,36.978 6.082,36.926 6.056,36.865 6.048,36.8 6.048,32.35 6.056,32.285 6.082,32.224 6.122,32.172 6.174,32.132 6.235,32.106 6.3,32.098 8.596,32.098 9.548,31.146 9.548,28.452 0.427,28.452 0.427,40.748 9.548,40.748
GND on Internal Plane 1 (split plane): 67.645,52.849 67.649,52.805 67.647,52.805 67.65,52.784 67.65,51.2 67.65,40.9 86.106,40.9 86.106,18.361 67.651,18.361 67.651,8.061 67.651,7.561 67.651,6.712 67.648,6.643 67.646,6.627 67.645,6.617 67.645,0.427 0.427,0.427 0.427,27.948 9.8,27.948 9.865,27.956 9.926,27.982 9.978,28.022 10.018,28.074 10.044,28.135 10.052,28.2 10.052,31.25 10.044,31.315 10.018,31.376 9.978,31.428 8.878,32.528 8.826,32.568 8.765,32.594 8.7,32.602 6.552,32.602 6.552,36.548 8.65,36.548 8.715,36.556 8.776,36.582 8.828,36.622 9.978,37.772 10.018,37.824 10.044,37.885 10.052,37.95 10.052,41 10.044,41.065 10.018,41.126 9.978,41.178 9.926,41.218 9.865,41.244 9.8,41.252 0.427,41.252 0.427,58.896 67.645,58.896

## Keep-outs
Keep-Out Layer, Board:
  lines w0.15: 0,0 68.072,0 68.072,6.618 cw(c70.015,6.58) 70.053,8.523 84.125,8.523 cw(c84.112,6.529) 86.106,6.516 86.106,-3.9 154.28,-3.9 154.28,63.209 86.106,63.209 86.106,53.049 cw(c84.239,52.986) 84.303,51.119 70.129,51.119 cw(c69.964,53.011) 68.072,52.846 68.072,59.323 0,59.323 0,0

## Other copper
Top Layer, Top:
  rectangle net NetC300_1: 55.4,36.15 57.95,38.15
  rectangle net +3.3V: 53.35,47.6 56.8,49.5
  rectangle net GND: 29.35,55.1 34.85,58.9
  rectangle net GND: 44.35,55.1 49.85,58.9
  pour cut-out: 19.35,10.9 25.15,10.9 25.15,12.9 19.35,12.9
  pour cut-out: 21.25,16.5 21.25,10.7 23.25,10.7 23.25,16.5
  pour cut-out: -0.05,27.95 10.05,27.95 10.05,31.35 8.8,32.6 6.55,32.6 6.55,36.55 8.75,36.55 10.05,37.85 10.05,41.25 -0.05,41.25
MidLayer1:
  pour cut-out: -0.05,29.25 5.55,29.25 5.55,31.6 3.65,31.6 3.65,36.65 5.55,36.65 5.55,39.85 -0.05,39.85
Bottom Layer, Bottom:
  rectangle net +3.3V: 53.35,47.6 56.8,49.5
  pour cut-out: -0.05,29.25 5.55,29.25 5.55,39.85 -0.05,39.85
  pour cut-out: 20.8,10.05 23.7,10.05 23.7,8.25 20.8,8.25
Internal Plane 1 (plane layer: these items are gaps in the copper):
  rectangle: 67.651,8.061 86.107,18.361
  rectangle: 67.651,6.411 68.148,8.061
  rectangle: 67.651,7.561 68.601,8.061
  rectangle: 85.601,7.511 86.107,8.061
  rectangle: 85.6,51.2 86.106,51.75
  rectangle: 67.65,51.2 68.6,51.7
  rectangle: 67.65,51.2 68.147,52.849
  rectangle: 67.65,40.9 86.106,51.2
  rectangle: 86.106,-3.9 154.28,63.209
  lines w0.5: -0.075,28.2 9.8,28.2 9.8,31.25 8.7,32.35 6.3,32.35 6.3,36.8 8.65,36.8 9.8,37.95 9.8,41 -0.075,41

## Silkscreen, mask and mechanical layers (free items; w line width, h text height)
Top Overlay, Top Silk:
  drawing of 3121 lines, arcs and shapes, not listed
  text "GND" at 58.7,56.85 h0.9
  text "GND" at 7.4,56.65 h0.9
  text "min. 7.5V" at 6.95,52.05 h1
  text "GND" at 57.35,51.65 h1.8
  text "ANT1" at 75.5,49 h1
  text "RXP" at 75.5,47.5 h1
  text "+3.3V" at 57.35,46.9 h1.8
  text "TVDD" at 47.3,46.1 h1
  text "TX1" at 75.5,46 h1
  text "VBAT" at 43.15,45.9 h1 r90
  text "+5V" at 44.75,45.9 h1 r90
  text "+3.3V" at 41.55,45.75 h1 r90
  text "GND_TVSS" at 75.5,44.5 h1
  text "TX2" at 75.5,43 h1
  text "RXN" at 75.5,41.5 h1
  text "EXT" at 36.05,40.15 h1 r90
  text "ANT2" at 75.5,40 h1
  text "+5V" at 31.65,39.75 h1.8
  text "V_USB" at 30.75,38.15 h1 r90
  text "TX" at 20.25,37.45 h1 r90
  text "RX" at 22.1,37.45 h1 r90
  text "GND" at 24.05,37.45 h1 r90
  text "VDHV" at 51.65,32.6 h1 r90
  text "VDD" at 42.7,31.3 h1
  text "BL2" at 38.4,26.05 h1 r90
  text "WDOFF" at 37.8,23.6 h1
  text "DWL" at 43,21.75 h1
  text "GPI1" at 36.55,21 h1 r90
  text "TVDD_OUT" at 56.05,18.85 h1
  text "BUSY" at 53.55,17.45 h0.8
  text "PN_RST" at 57.25,17.45 h0.8
  text "IRQ" at 62.4,17.45 h0.8
  text "BL1" at 35.85,14.55 h1 r90
  text ".revision" at 130.1,10.5 h1
  text "ARM RESET" at 1,7.2 h1
  text "PN5180 RESET" at 41.5,6.15 h1
  text "GND" at 7.7,5.9 h0.9
  text "GND" at 54.65,4 h0.9
  text "GND" at 11.75,3.25 h0.9 r90
  text "IRQ" at 13,3.25 h0.9 r90
  text "AUX1" at 14.25,3.25 h0.9 r90
  text "DWL" at 15.5,3.25 h0.9 r90
  text "GPO1" at 16.75,3.25 h0.9 r90
  text "GND" at 18,3.25 h0.9 r90
  text "SSEL" at 35.75,3.25 h0.9 r90
  text "MOSI" at 38.25,3.25 h0.9 r90
  text "MISO" at 40.75,3.25 h0.9 r90
  text "SCK" at 43.5,3.25 h0.9 r90
  text "GND" at 48.5,3.25 h0.9 r90
  text "+3.3V" at 31.4,3.1 h0.9 r90
  text "PN_RST" at 33.25,3.1 h0.9 r90
  text "BUSY" at 45.75,2.75 h0.9 r90
  text ".title" at 50.4,1.85 h1
  text ".revision" at 58.85,1.85 h1
  text "Customer Evaluation Board" at 49.75,0.5 h0.95
Mechanical 1:
  lines w0.15: 68.072,0 68.072,59.323
Mechanical 3, Kotiranje:
  lines w0.15: 0.012,30.15 0.95,30.15 ; 0.95,29.65 154.35,29.65
Mechanical 15:
  drawing of 1461 lines, arcs and shapes, not listed
  text "8" at -149.528,175.311 h1.78
  text "7" at -100.506,175.311 h1.78
  text "6" at -50.976,175.311 h1.78
  text "5" at -1.954,175.311 h1.78
  text "4" at 47.322,175.311 h1.78
  text "3" at 96.615,175.311 h1.78
  text "2" at 145.874,175.311 h1.78
  text "1" at 194.913,175.311 h1.78
  text "A" at -171.3,141.35 h1.78
  text "A" at 217.045,141.326 h1.78
  text "B" at -171.575,70.714 h1.78
  text "B" at 217.045,70.714 h1.78
  text "C" at -171.575,0.102 h1.78
  text "C" at 217.045,0.102 h1.78
  text "D" at -171.575,-70.002 h1.78
  text "D" at 217.045,-70.002 h1.78
  text ".Title" at -86.77,-83.12 h5.64
  text "Title:" at -82.27,-83.12 h2
  text ".Revision" at -139.77,-86.62 h2
  text "Revision:" at -132.27,-86.62 h2
  text ".Date" at -86.77,-86.62 h2
  text "Date:" at -82.27,-86.62 h2
  text ".Designed_by" at -142.77,-89.12 h2
  text "Designed by:" at -132.27,-89.12 h2
  text ".Pcb_File_Name_No_Path" at -86.77,-89.12 h2
  text "File:" at -82.27,-89.12 h2
  text "8" at -149.528,-101.549 h1.78
  text "7" at -100.506,-101.549 h1.78
  text "6" at -50.976,-101.549 h1.78
  text "5" at -1.954,-101.549 h1.78
  text "4" at 47.322,-101.549 h1.78
  text "3" at 96.615,-101.549 h1.78
  text "2" at 145.874,-101.549 h1.78
  text "1" at 194.913,-101.549 h1.78
Mechanical 16:
  drawing of 1460 lines, arcs and shapes, not listed
  text "1" at -150.713,175.311 h1.78
  text "2" at -101.674,175.311 h1.78
  text "3" at -52.415,175.311 h1.78
  text "4" at -3.122,175.311 h1.78
  text "5" at 46.154,175.311 h1.78
  text "6" at 95.176,175.311 h1.78
  text "7" at 144.706,175.311 h1.78
  text "8" at 193.728,175.311 h1.78
  text "A" at 215.5,141.35 h1.78
  text "A" at -172.845,141.326 h1.78
  text "B" at -172.845,70.714 h1.78
  text "B" at 215.775,70.714 h1.78
  text "C" at -172.845,0.102 h1.78
  text "C" at 215.775,0.102 h1.78
  text "D" at -172.845,-70.002 h1.78
  text "D" at 215.775,-70.002 h1.78
  text "Title:" at 126.47,-83.12 h2
  text ".Title" at 130.97,-83.12 h5.64
  text "Date:" at 126.47,-86.62 h2
  text ".Date" at 130.97,-86.62 h2
  text "Revision:" at 176.47,-86.62 h2
  text ".Revision" at 183.97,-86.62 h2
  text "File:" at 126.47,-89.12 h2
  text ".Pcb_File_Name_No_Path" at 130.97,-89.12 h2
  text "Designed by:" at 176.47,-89.12 h2
  text ".Designed_by" at 186.97,-89.12 h2
  text "1" at -150.713,-101.549 h1.78
  text "2" at -101.674,-101.549 h1.78
  text "3" at -52.415,-101.549 h1.78
  text "4" at -3.122,-101.549 h1.78
  text "5" at 46.154,-101.549 h1.78
  text "6" at 95.176,-101.549 h1.78
  text "7" at 144.706,-101.549 h1.78
  text "8" at 193.728,-101.549 h1.78
Drill Drawing, Drill:
  circle w0.15: c-147.828,-29.285 r0.556
  lines w0.15: -149.375,-30.591 -84.992,-30.591 ; -149.375,-10.591 -84.992,-10.591 ; -140.247,-33.091 -140.247,-8.091 ; -128.67,-33.091 -128.67,-8.091 ; -106.297,-33.091 -106.297,-8.091 ; -97.919,-33.091 -97.919,-8.091 ; -149.375,-33.091 -84.992,-33.091 -84.992,-8.091 -149.375,-8.091 -149.375,-33.091 ; -148.384,-27.063 -148.106,-27.063 -148.106,-27.341 -147.55,-27.341 -147.55,-27.063 -147.273,-27.063 -147.273,-26.508 -147.55,-26.508 -147.55,-26.23 -148.106,-26.23 -148.106,-26.508 -148.384,-26.508 -148.384,-27.063 ; -148.384,-24.841 -147.828,-24.563 -147.273,-24.841 -147.55,-24.285 -147.273,-23.73 -147.828,-24.008 -148.384,-23.73 -148.106,-24.285 -148.384,-24.841 ; -148.384,-22.341 -148.384,-22.063 -148.106,-21.785 -148.384,-21.508 -148.384,-21.23 -148.106,-21.23 -147.828,-21.508 -147.55,-21.23 -147.273,-21.23 -147.273,-21.508 -147.55,-21.785 -147.273,-22.063 -147.273,-22.341 -147.55,-22.341 -147.828,-22.063 -148.106,-22.341 -148.384,-22.341 ; -148.384,-18.73 -147.273,-18.73 -147.828,-19.841 -148.384,-18.73 ; -148.384,-17.063 -148.106,-17.063 -148.106,-17.341 -147.55,-17.341 -147.55,-17.063 -147.273,-17.063 -147.273,-16.508 -147.55,-16.508 -147.55,-16.23 -148.106,-16.23 -148.106,-16.508 -148.384,-16.508 -148.384,-17.063 ; -148.384,-12.341 -148.384,-12.063 -148.106,-11.785 -148.384,-11.508 -148.384,-11.23 -148.106,-11.23 -147.828,-11.508 -147.55,-11.23 -147.273,-11.23 -147.273,-11.508 -147.55,-11.785 -147.273,-12.063 -147.273,-12.341 -147.55,-12.341 -147.828,-12.063 -148.106,-12.341 -148.384,-12.341 ; -148.161,-16.952 -147.995,-16.952 -147.995,-17.119 -147.661,-17.119 -147.661,-16.952 -147.495,-16.952 -147.495,-16.619 -147.661,-16.619 -147.661,-16.452 -147.995,-16.452 -147.995,-16.619 -148.161,-16.619 -148.161,-16.952 ; -148.161,-12.119 -148.161,-11.952 -147.995,-11.785 -148.161,-11.619 -148.161,-11.452 -147.995,-11.452 -147.828,-11.619 -147.661,-11.452 -147.495,-11.452 -147.495,-11.619 -147.661,-11.785 -147.495,-11.952 -147.495,-12.119 -147.661,-12.119 -147.828,-11.952 -147.995,-12.119 -148.161,-12.119
  lines w0.2: -149.5,60 -123.5,60 ; -149.5,63 -123.5,63 ; -149.5,66 -123.5,66 ; -149.5,69 -123.5,69 ; -141.5,57 -141.5,77.5 ; -149.5,57 -149.5,77.5 -123.5,77.5 -123.5,57 -149.5,57
  text "Master Drawings:" at -149.65,151.8 h2
  text "- material: FR4, Tg: 150" at -149.65,147.8 h2
  text "- thickness: 1.6mm (min 1.44, max 1.7mm)" at -149.65,145.3 h2
  text "- layer stackup: - Top Cu: 35um" at -149.65,143.3 h2
  text "- prepreg 0.14mm" at -133.15,141.3 h2
  text "- Internal Plane1 Cu: 35um" at -137.15,139.3 h2
  text "- core 1.0mm" at -133.65,137.3 h2
  text "- MidLayer1 Cu: 35um" at -137.15,135.3 h2
  text "- prepreg 0.14mm" at -133.65,133.3 h2
  text "- Bottom Cu: 35um" at -137.15,131.3 h2
  text "- min. hole metalization: 20um" at -149.65,128.8 h2
  text "- surface finishing: ENIG" at -149.65,126.3 h2
  text "- solder mask: - in accordance with IPC-SM-840" at -149.65,121.8 h2
  text "- Liquid Photo Imageable (LPI)" at -149.65,119.8 h2
  text "- color: GREEN" at -149.65,117.8 h2
  text "- unless otherwise defined (in gerber)," at -149.65,115.8 h2
  text "solder mask overlap on SMT pads is not allowed" at -149.65,113.8 h2
  text "- silk screen: Yes, White" at -149.15,109.3 h2
  text "- impedance control: Yes, see table below" at -149.15,106.8 h2
  text "- board must meet the acceptable level of IPC-A-600, Class 2, current revision." at -149.15,104.3 h2
  text "- bow and twist: - max. 0.75% SMT boards" at -149.15,101.8 h2
  text "- max. 1.5%  THT boards" at -149.15,99.8 h2
  text "- point of origin (0,0): bottom left corner" at -149.15,97.8 h2
  text "- board is designed on 0.050 mm grid" at -149.15,95.3 h2
  text "- primary side: Top layer" at -149.15,92.8 h2
  text "Impedance table:" at -149.5,78.5 h2
  text "Differentail pair" at -140.5,75.5 h2
  text "90 [ohm]" at -140.5,73 h2
  text "Width / Spacing [mm]" at -141,70 h2
  text "Layer1" at -148.5,67 h2
  text "0.22 / 0.3" at -137.5,67 h2
  text "Layer2" at -148.5,64 h2
  text "Layer3" at -148.5,61 h2
  text "0.18 / 0.40" at -137.5,61 h2
  text "Layer4*" at -148.5,58 h2
  text "0.22 / 0.3" at -137.5,58 h2
  text "Symbol" at -147.875,-9.841 h1.2
  text "Hit Count" at -139.497,-9.841 h1.2
  text "Finished Hole Size" at -127.92,-9.841 h1.2
  text "Plated" at -105.547,-9.841 h1.2
  text "Hole Type" at -97.169,-9.841 h1.2
  text "1" at -139.497,-12.341 h1
  text "1,000mm (39,37mil)" at -127.92,-12.341 h1
  text "PTH" at -105.547,-12.341 h1
  text "Slot" at -97.169,-12.341 h1
  text "2" at -139.497,-14.841 h1
  text "0,700mm (27,56mil)" at -127.92,-14.841 h1
  text "NPTH" at -105.547,-14.841 h1
  text "Round" at -97.169,-14.841 h1
  text "A" at -148.348,-14.991 h1.11
  text "2" at -139.497,-17.341 h1
  text "1,000mm (39,37mil)" at -127.92,-17.341 h1
  text "NPTH" at -105.547,-17.341 h1
  text "Round" at -97.169,-17.341 h1
  text "2" at -139.497,-19.841 h1
  text "1,000mm (39,37mil)" at -127.92,-19.841 h1
  text "PTH" at -105.547,-19.841 h1
  text "Slot" at -97.169,-19.841 h1
  text "4" at -139.497,-22.341 h1
  text "3,200mm (126,00mil)" at -127.92,-22.341 h1
  text "NPTH" at -105.547,-22.341 h1
  text "Round" at -97.169,-22.341 h1
  text "26" at -139.497,-24.841 h1
  text "1,000mm (39,37mil)" at -127.92,-24.841 h1
  text "PTH" at -105.547,-24.841 h1
  text "Round" at -97.169,-24.841 h1
  text "27" at -139.497,-27.341 h1
  text "1,016mm (40,00mil)" at -127.92,-27.341 h1
  text "PTH" at -105.547,-27.341 h1
  text "Round" at -97.169,-27.341 h1
  text "342" at -139.497,-29.841 h1
  text "0,300mm (11,81mil)" at -127.92,-29.841 h1
  text "PTH" at -105.547,-29.841 h1
  text "Round" at -97.169,-29.841 h1
  text "406 Total" at -139.497,-32.341 h1
  text "Slot definitions :" at -147.875,-34.724 h1
  text "Rout Path Length" at -130.71,-34.724 h1
  text "= Calculated from tool start centre position to tool end centre position." at -114.378,-34.724 h1
  text "Hole Length" at -130.71,-36.357 h1
  text "= Rout Path Length + Tool Size = Slot length as defined in the PCB layout" at -119.21,-36.357 h1

## Dimensions
0,0 to 154.28,-3.9 on Drill Drawing, Drill
154.28,-3.9 to 154.28,63.209 on Drill Drawing, Drill

## Text inside footprints (layer, text, board x,y; h text height)
C101: Top Overlay, Top Silk "+" at 27.3,49.8 h1 r180
C102: Top Overlay, Top Silk "+" at 35.6,48.95 h1 r270
C105: Top Overlay, Top Silk "+" at 43.8,49.7 h0.64 r90
C106: Top Overlay, Top Silk "+" at 51.2,49.9 h0.64 r90
C300: Top Overlay, Top Silk "+" at 58.85,37.3 h0.64 r270
D100: Top Overlay, Top Silk "-" at 21,53.95 h1.2 r270; Top Overlay, Top Silk "+" at 21,51.45 h1.2 r270; Mechanical 9, Top Assembly "+" at 21.012,51.411 h2 r270; Mechanical 9, Top Assembly "-" at 21.139,53.697 h2 r270
J102: Mechanical 3, Kotiranje "pcb edge" at 2.2,32.65 h0.5 r90
J103: Mechanical 3, Kotiranje "pcb edge" at 0.75,32.5 h0.5 r270
L2: Mechanical 55 "Antenna 65x65mm, 2 Turns, V1.0" at 107.433,10.46 h2.05; Mechanical 55 "NIS" at 92.606,1.005 h1.26